# EAGLE board MainStation (EAGLE 5.00)
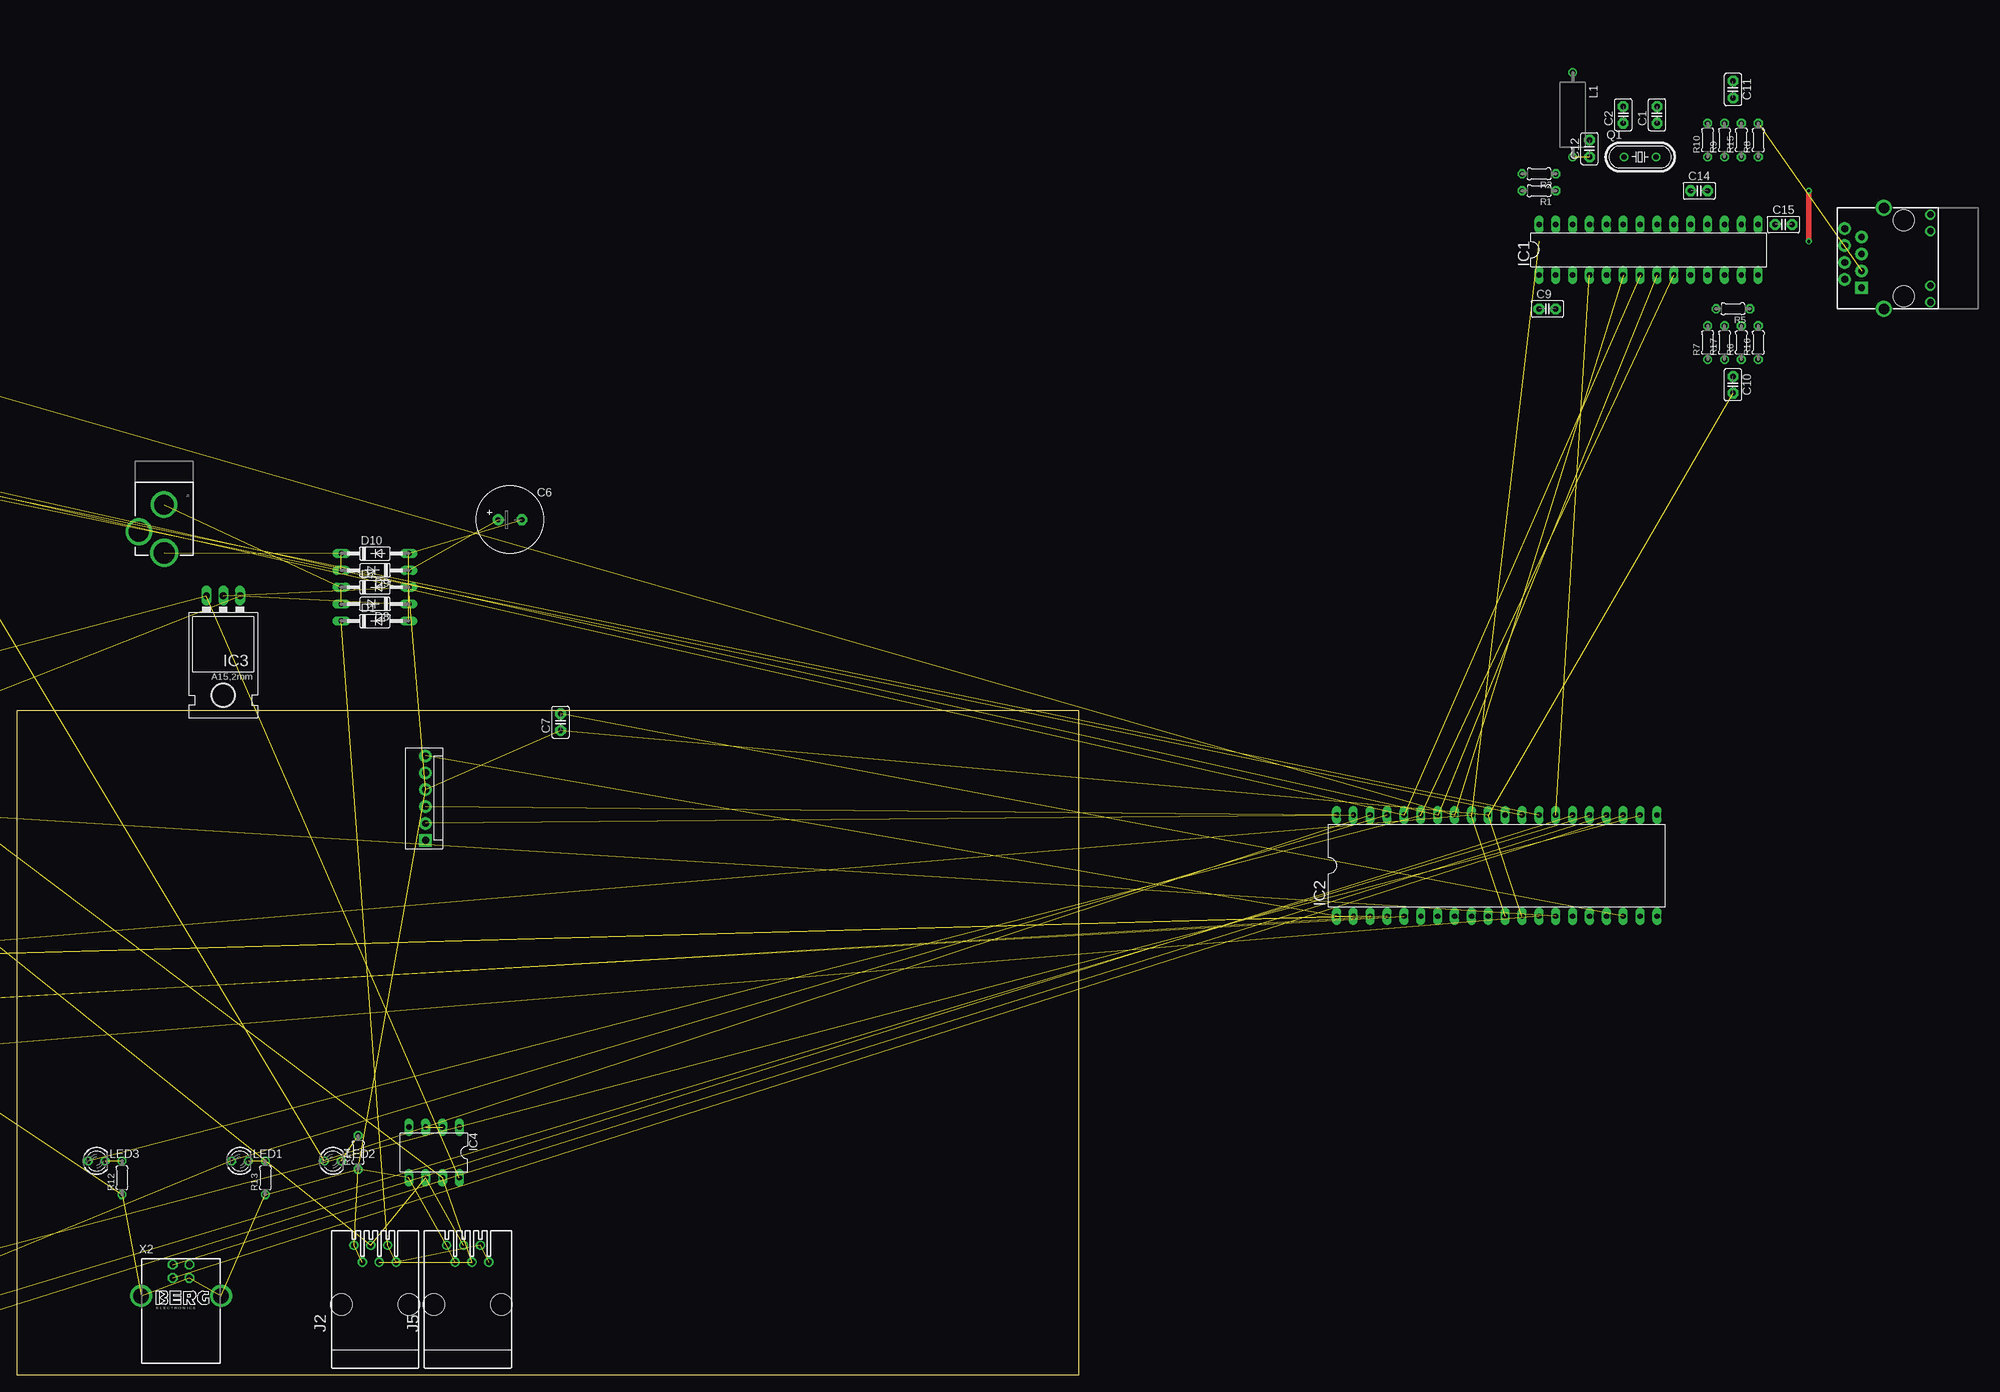
[diagram p0: board, top side]
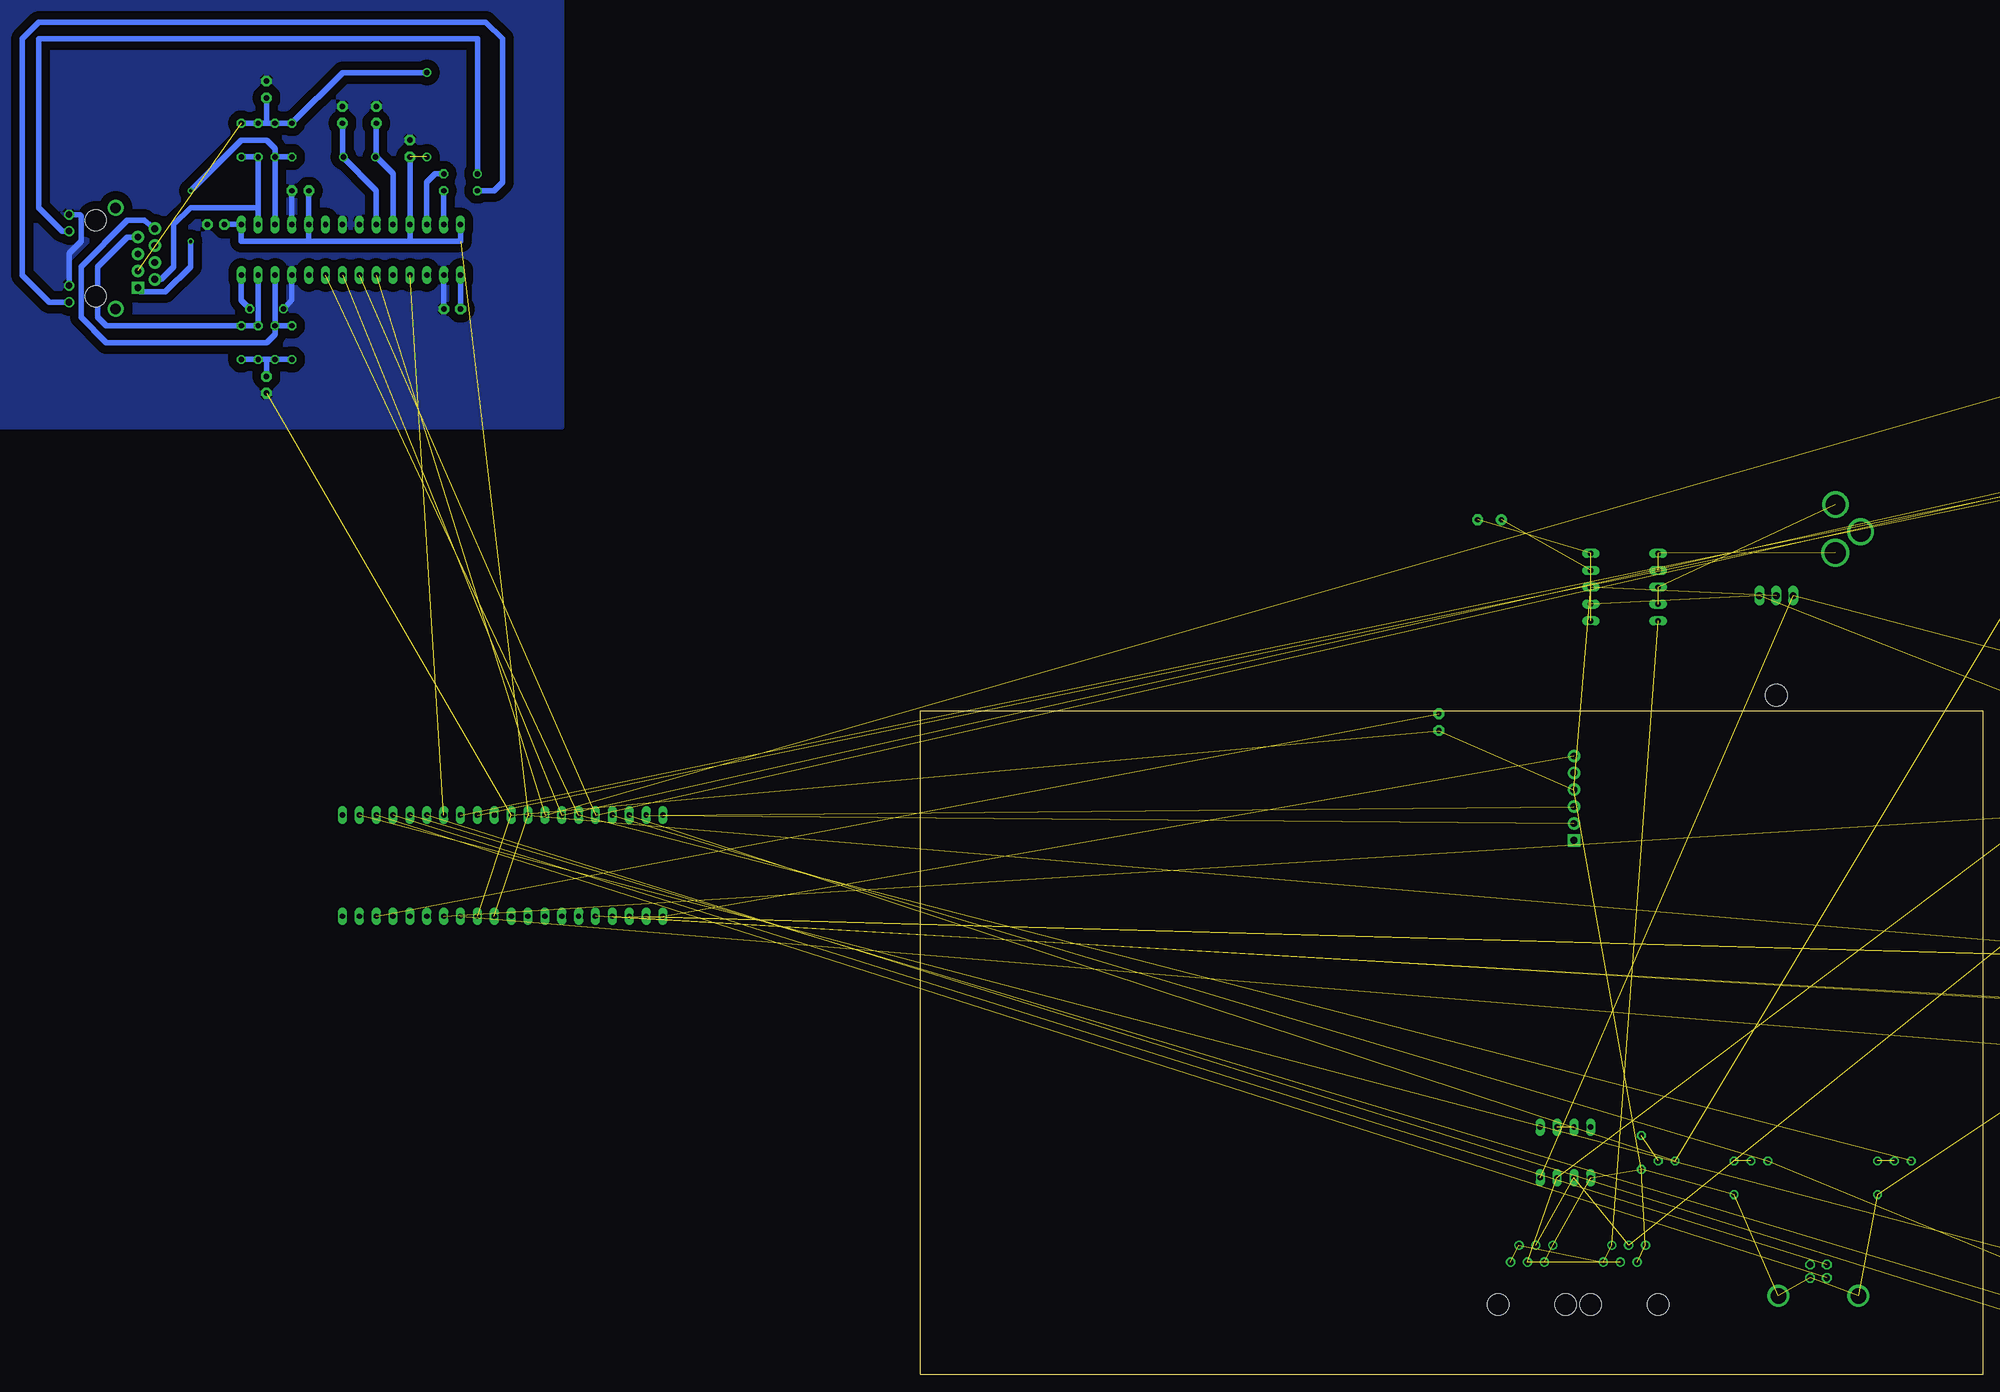
[diagram p1: board, bottom side, seen from below]

Size 160 x 100 mm. Coordinates in mm from the lower left corner, seen from the top.
Outline: 0,0 160,0 160,100 0,100 0,0
Copper layers (1*16): Top 0.035mm / dielectric 1.5mm / Bottom 0.035mm
Design rules "default": minimum track width 10mil, minimum drill 24mil, track to track 8mil, track to pad 8mil, pad to pad 8mil, via to via 8mil, smd to smd 8mil, copper to edge 40mil, drill to drill 8mil, minimum pad ring 10mil, minimum via ring 8mil, stop-mask expansion 4mil, vias tented up to drill 0mil, thermal gap 10mil

## Footprints (pad centres in the part's own frame; a part is rotated, then mirrored left to right if it is on the bottom)
C2.5-2 = drill 0.813 pad 1.6 octagon: 1 -1.27,0; 2 1.27,0
E2,5-5 = drill 0.813 pad 1.6 round: + -1.27,0 | drill 0.813 pad 1.6 octagon: - 1.27,0
E3,5-10 = drill 0.813 pad 1.6 round: + -1.778,0 | drill 0.813 pad 1.6 octagon: - 1.778,0
C050-025X075 = drill 0.813 octagon: 1 -2.54,0; 2 2.54,0
DO35-10 = drill 0.813 long: A 5.08,0; C -5.08,0
DIL28-3 = drill 0.813 long: 1 -16.51,-3.81; 2 -13.97,-3.81; 3 -11.43,-3.81; 4 -8.89,-3.81; 5 -6.35,-3.81; 6 -3.81,-3.81; 7 -1.27,-3.81; 8 1.27,-3.81; 9 3.81,-3.81; 10 6.35,-3.81; 11 8.89,-3.81; 12 11.43,-3.81; 13 13.97,-3.81; 14 16.51,-3.81; 15 16.51,3.81; 16 13.97,3.81; 17 11.43,3.81; 18 8.89,3.81; 19 6.35,3.81; 20 3.81,3.81; 21 1.27,3.81; 22 -1.27,3.81; 23 -3.81,3.81; 24 -6.35,3.81; 25 -8.89,3.81; 26 -11.43,3.81; 27 -13.97,3.81; 28 -16.51,3.81
DIL40 = drill 0.813 long: 1 -24.13,-7.62; 2 -21.59,-7.62; 3 -19.05,-7.62; 4 -16.51,-7.62; 5 -13.97,-7.62; 6 -11.43,-7.62; 7 -8.89,-7.62; 8 -6.35,-7.62; 9 -3.81,-7.62; 10 -1.27,-7.62; 11 1.27,-7.62; 12 3.81,-7.62; 13 6.35,-7.62; 14 8.89,-7.62; 15 11.43,-7.62; 16 13.97,-7.62; 17 16.51,-7.62; 18 19.05,-7.62; 19 21.59,-7.62; 20 24.13,-7.62; 21 24.13,7.62; 22 21.59,7.62; 23 19.05,7.62; 24 16.51,7.62; 25 13.97,7.62; 26 11.43,7.62; 27 8.89,7.62; 28 6.35,7.62; 29 3.81,7.62; 30 1.27,7.62; 31 -1.27,7.62; 32 -3.81,7.62; 33 -6.35,7.62; 34 -8.89,7.62; 35 -11.43,7.62; 36 -13.97,7.62; 37 -16.51,7.62; 38 -19.05,7.62; 39 -21.59,7.62; 40 -24.13,7.62
78XXL = drill 1.016 long: GND 0,-3.81; IN -2.54,-3.81; OUT 2.54,-3.81 | hole 3.302: 0,11.176
DIL08 = drill 0.813 long: 1 -3.81,-3.81; 2 -1.27,-3.81; 3 1.27,-3.81; 4 3.81,-3.81; 5 3.81,3.81; 6 1.27,3.81; 7 -1.27,3.81; 8 -3.81,3.81
POWER_JACK_PTH_LOCK = drill 2.997 round: GND 0.025,6.608; GNDBREAK 3.812,10.7 | drill 3.2 round: PWR 0,13.878
520470-3 = drill 0.889 round: 1 -3.175,8.89; 2 -1.905,6.35; 3 -0.635,8.89; 4 0.635,6.35; 5 1.905,8.89; 6 3.175,6.35 | hole 3.251: -5.08,0; 5.08,0
2200-12.7 = drill 0.8 pad 1.27 round: 1 -6.35,0; 2 6.35,0
LED3MM = drill 0.813 octagon: A -1.27,0; K 1.27,0
HC49/S = drill 0.813 round: 1 -2.413,0; 2 2.413,0
0204/5 = drill 0.813 octagon: 1 -2.54,0; 2 2.54,0
0204/7 = drill 0.813 octagon: 1 -3.81,0; 2 3.81,0
MICRO-SD-SOCKET-PP = smd 0.8 x 1.5: 1 -8.94,10.7; 2 -7.84,10.3; 3 -6.74,10.7; 4 -5.64,10.9; 5 -4.54,10.7; 6 -3.44,10.9; 7 -2.34,10.7; 8 -1.24,10.7 | smd 1.8 x 1.4: CD1 -2.05,0.4; CD2 -7.75,0.4 | smd 1.4 x 1.9: GND1 -13.6,14.55; GND3 -0.45,13.55
DIL8 = drill 0.813 long: 1 -3.81,-3.81; 2 -1.27,-3.81; 3 1.27,-3.81; 4 3.81,-3.81; 5 3.81,3.81; 6 1.27,3.81; 7 -1.27,3.81; 8 -3.81,3.81
23A256 = drill 0.8 long: CS -5.08,-5.08; HOLD -2.54,2.54; NC 0,-5.08; SCK 0,2.54; SI 2.54,2.54; SO -2.54,-5.08; VCC -5.08,2.54; VSS 2.54,-5.08
MOLEX-1X6 = drill 1.016 pad 1.88 square: 1 0,0 | drill 1.016 pad 1.88 round: 2 2.54,0; 3 5.08,0; 4 7.62,0; 5 10.16,0; 6 12.7,0
MRF24J40MA = drill 0.8 pad 2.032 square: CS(LOW) 15.748,4.064; GND 0,14.224; GND1 15.748,11.684; GND2 15.748,14.224; INT 0,6.604; NC 15.748,6.604; RESET 0,11.684; SCK 0,1.524; SDI 0,4.064; SDO 15.748,1.524; VIN 15.748,9.144; WAKE 0,9.144
MAGJACK = drill 1 pad 1.88 square: 1 3.175,17.445 | drill 1 pad 1.88 round: 2 4.445,19.985; 3 5.715,17.445; 4 6.985,19.985; 5 8.255,17.445; 6 9.525,19.985; 7 10.795,17.445; 8 12.065,19.985 | drill 1 pad 1.27 round: 9 1,7.1; 10 3.5,7.1; 11 11.7,7.1; 12 14.2,7.1 | drill 1.6 pad 2.184 round: M1 0,14.1; M2 15.2,14.1 | hole 3.2: 1.905,11.095; 13.335,11.095
PN61729-S = drill 0.95 octagon: 1 1.25,4.71; 2 -1.25,4.71; 3 -1.25,2.71; 4 1.25,2.71 | drill 2.3 pad 2.9 round: S1 -6.02,0; S2 6.02,0

## Placement (x,y rotation side)
C1  [C2.5-2]  247.01,189.7 90 top  (outside the outline)
C2  [C2.5-2]  241.93,189.7 90 top  (outside the outline)
C3  [C2.5-2]  -32.39,53.81 0 top  (outside the outline)
C4  [C2.5-2]  -32.39,47.46 0 top  (outside the outline)
C5  10uf  [E2,5-5]  -53.98,93.18 0 top  (outside the outline)
C6  470uf  [E3,5-10]  74.29,128.74 0 top  (outside the outline)
C7  100nf  [C2.5-2]  81.91,98.26 90 top
C8  470uf  [E3,5-10]  -41.28,42.38 0 top  (outside the outline)
C9  10uf  [C2.5-2]  230.5,160.49 0 top  (outside the outline)
C10  100nf  [C2.5-2]  258.44,149.06 270 top  (outside the outline)
C11  100nf  [C2.5-2]  258.44,193.51 270 top  (outside the outline)
C12  100nf ?  [C2.5-2]  236.85,184.62 90 top  (outside the outline)
C13  10uf  [E2,5-5]  -144.15,-47.79 0 top  (outside the outline)
C14  100nf ?  [C2.5-2]  253.36,178.27 0 top  (outside the outline)
C15  100nf ?  [C2.5-2]  266.06,173.19 0 top  (outside the outline)
C18  100nf  [C050-025X075]  -41.28,86.83 0 top  (outside the outline)
C19  100nf  [C050-025X075]  -50.17,86.83 0 top  (outside the outline)
D1  [DO35-10]  53.97,113.5 0 top  (outside the outline)
D7  BA243A  [DO35-10]  53.97,118.58 0 top  (outside the outline)
D8  BA243A  [DO35-10]  53.97,116.04 180 top  (outside the outline)
D9  BA243A  [DO35-10]  53.97,121.12 180 top  (outside the outline)
D10  BA243A  [DO35-10]  53.97,123.66 0 top  (outside the outline)
IC1  ENC28J60SP  [DIL28-3]  245.74,169.38 0 top  (outside the outline)
IC2  PIC18F4550_40  [DIL40]  222.88,76.67 0 top  (outside the outline)
IC3  LM7805  [78XXL]  31.11,113.5 180 top
IC4  LTC485N  [DIL08]  62.86,33.49 180 top
J1  POWER_JACKPTH_LOCK  [POWER_JACK_PTH_LOCK]  22.22,137.63 180 top  (outside the outline)
J2  [520470-3]  53.97,10.63 0 top
J5  [520470-3]  67.94,10.63 0 top
L1  100u  [2200-12.7]  234.31,189.7 270 top  (outside the outline)
LED1  [LED3MM]  33.65,32.22 0 top
LED2  [LED3MM]  47.62,32.22 0 top
LED3  [LED3MM]  12.06,32.22 0 top
Q1  25Mhz  [HC49/S]  244.47,183.35 0 top  (outside the outline)
Q2  12Mhz  [HC49/S]  -31.12,85.56 0 top  (outside the outline)
R1  56  [0204/5]  229.23,178.27 180 top  (outside the outline)
R2  56  [0204/5]  229.23,180.81 180 top  (outside the outline)
R3  10k  [0204/7]  -32.39,99.53 0 top  (outside the outline)
R4  10k  [0204/7]  -42.55,99.53 0 top  (outside the outline)
R5  2.32k 1%  [0204/5]  258.44,160.49 180 top  (outside the outline)
R6  100 1%  [0204/5]  259.71,155.41 90 top  (outside the outline)
R7  100 1%  [0204/5]  254.63,155.41 90 top  (outside the outline)
R8  100 1%  [0204/5]  262.25,185.89 90 top  (outside the outline)
R9  100 1%  [0204/5]  257.17,185.89 90 top  (outside the outline)
R10  100 1%  [0204/5]  254.63,185.89 90 top  (outside the outline)
R12  500  [0204/5]  15.87,29.68 90 top
R13  500  [0204/5]  37.46,29.68 90 top
R14  500  [0204/5]  51.43,33.49 90 top
R15  100 1%  [0204/5]  259.71,185.89 90 top  (outside the outline)
R16  100 1%  [0204/5]  262.25,155.41 90 top  (outside the outline)
R17  100 1%  [0204/5]  257.17,155.41 90 top  (outside the outline)
U1  USD-SOCKETNEW  [MICRO-SD-SOCKET-PP]  -127.64,-30.01 90 top  (outside the outline)
U2  MCP2551P  [DIL8]  -12.07,11.9 0 top  (outside the outline)
U$1  23A256  [23A256]  -28.58,60.16 0 top  (outside the outline)
U$2  PIC-ICSPPTH  [MOLEX-1X6]  61.59,80.48 90 top
U$3  MRF24J40MA  [MRF24J40MA]  -22.23,137.63 90 top  (outside the outline)
U$6  MAGJACK  [MAGJACK]  295.27,160.49 90 top  (outside the outline)
X2  PN61729-S  [PN61729-S]  24.76,11.9 0 top

## Library data of the parts
C1-C4 C7 C9-C12 C14 C15 = capacitor-wima
C5 C6 C8 C13 C18 C19 R1-R10 R12-R17 = rcl
D1 D7-D10 = diode
IC1 = microchip-6
IC2 = microchip
IC3 = v-reg
IC4 = linear-technology
J1 U1 U$2 U$6 = SparkFun
J2 J5 = con-amp
L1 = resistor
LED1-LED3 = led
Q1 Q2 = crystal
U2 = microchip_can
U$1 = 23A256
U$3 = MRF24J40MA
X2 = con-berg

## Nets
3.3V: C12.1 C14.1 C15.1 IC1.15 IC1.19 IC1.25 IC1.28 IC2.11 IC2.32 L1.2 U1.4 U$1.VCC U$3.VIN
5V: C5.+ C19.1 IC3.OUT IC4.8 R4.2
12V: C6.+ C8.+ C18.1 D1.A D8.C D9.C IC3.IN
GND: C1.2 C2.2 C3.1 C4.1 C5.- C6.- C7.1 C8.- C9.2 C10.2 C11.1 C12.2 C14.2 C15.2 C18.2 C19.2 D7.A D10.A IC1.2 IC1.11 IC1.18 IC1.21 IC1.22 IC2.12 IC2.31 IC3.GND IC4.5 J2.1 J2.2 J5.1 J5.2 R3.1 R5.2 R12.1 R13.1 R14.1 U1.6 U1.CD1 U1.CD2 U1.GND1 U1.GND3 U$1.VSS U$2.4 U$3.GND U$3.GND1 U$3.GND2 U$6.10 U$6.12 X2.4 X2.S1 X2.S2
N$1: R1.2 U$6.9
N$2: R2.2 U$6.11
N$3: IC1.7 IC2.36 U1.3 U$3.SDI
N$4: C2.1 IC1.24 Q1.1
N$5: IC1.12 R7.2 R17.2 U$6.8
N$6: C11.2 L1.1 R8.2 R9.2 R10.2 R15.2 U$6.3
N$7: C10.1 R6.1 R7.1 R16.1 R17.1
N$8: IC1.16 R8.1 R15.1 U$6.2
N$9: C1.1 IC1.23 Q1.2
N$10: C3.2 IC2.14 Q2.2
N$11: IC1.8 IC2.34 U1.5 U$3.SCK
N$12: IC1.6 IC2.33 U1.7 U$3.SDO
N$13: IC1.9 IC2.35 LED3.A
N$14: C7.2 IC2.18
N$15: IC1.13 R6.2 R16.2 U$6.7
N$16: IC2.40 U$2.3
N$17: IC2.39 U$2.2
N$18: IC2.1 U$2.6
N$19: IC1.26 R2.1
N$20: IC2.24 X2.2
N$21: C4.2 IC2.13 Q2.1
N$22: IC1.4 IC2.27
N$23: IC2.37 LED1.A U1.2
N$24: IC2.38 LED2.A U$3.CS(LOW)
N$25: IC2.23 X2.3
N$26: U$3.RESET
N$27: D7.C D8.A J1.GND
N$28: D9.A D10.C J1.PWR
N$29: IC4.6 J2.3 J5.3 R4.1
N$30: IC4.7 J2.4 J5.4 R3.2
N$31: IC2.26 U2.4
N$32: IC2.22 U2.8
N$33: D1.C J2.5 J2.6 J5.5 J5.6
N$34: IC2.2 U$1.SCK
N$35: IC2.30
N$36: IC2.29 U$3.WAKE
N$37: IC2.28 U$3.INT
N$38: IC1.27 R1.1
N$40: IC1.17 R9.1 R10.1 U$6.1
N$41: IC2.25 U2.1
N$42: C9.1 IC1.1
N$43: IC1.14 R5.1
N$45: IC2.3 U$1.SI
N$46: IC2.4 U$1.SO
N$47: IC2.5 U$1.CS
N$48: LED3.K R12.2
N$49: LED2.K R14.2
N$50: LED1.K R13.2
N$51: IC4.2 IC4.3
VDD: U2.3
VREF: U2.5
VSS: U2.2

## Tracks (layer width: path | path; a pad name or v marks a point on that pad's centre or on a via)
3.3V  (6 unrouted)
  Bottom 0.813: C14.1 IC1.19 252.09,170.65 | C15.1 IC1.15 262.25,170.65 252.09,170.65 | IC1.25 C12.1 IC1.25 | IC1.28 229.23,170.65 230.5,170.65 236.85,170.65 | 236.85,170.65 IC1.25 | 236.85,170.65 252.09,170.65
5V  (4 unrouted)
12V  (6 unrouted)
GND  (35 unrouted)
  Bottom 0.813: IC1.18 C14.2 | C9.2 IC1.2 | R5.2 254.63,161.76 IC1.11 | U$6.10 288.17,168.86 286.38,170.65 286.38,174.46 286.61,174.69 U$6.12
  pour Bottom (isolate 1.27): 213.99,213.83 309.24,213.83 309.24,142.71 213.99,142.71
N$1
  Bottom 0.813: U$6.9 291.19,161.49 295.27,165.57 295.27,201.13 292.73,203.67 225.42,203.67 222.88,201.13 222.88,179.54 224.15,178.27 R1.2
N$2
  Bottom 0.813: R2.2 226.69,201.13 292.73,201.13 292.73,175.73 289.19,172.19 U$6.11
N$3  (3 unrouted)
N$4
  Bottom 0.813: 241.93,183.35 C2.1 | 242.06,183.48 Q1.1 241.93,183.35 | IC1.24 239.39,180.81 241.93,183.35
N$5
  Bottom 0.813: 257.17,159.22 R17.2 R7.2 | 257.17,159.22 IC1.12 | U$6.8 276.86,173.82 279.39,173.82 286.38,166.84 286.38,159.22 282.57,155.41 258.44,155.41 257.17,156.68 257.17,159.22
N$6  (1 unrouted)
  Bottom 0.813: 258.44,188.43 C11.2 | 258.44,188.43 R9.2 R10.2 247.01,196.05 L1.1 | 258.44,188.43 R15.2 R8.2
N$7
  Bottom 0.813: R7.1 R17.1 258.44,152.87 | R16.1 R6.1 258.44,152.87 | C10.1 258.44,152.87
N$8
  Bottom 0.813: 259.71,175.73 R15.1 R8.1 | IC1.16 259.71,175.73 | 259.71,175.73 269.87,175.73 272.41,173.19 272.41,166.84 274.31,164.94 U$6.2
N$9
  Bottom 0.813: 247.01,183.35 C1.1 | IC1.23 241.93,178.27 247.01,183.35 | 247.01,183.35 Q1.2
N$10  (2 unrouted)
N$11  (3 unrouted)
N$12  (3 unrouted)
N$13  (2 unrouted)
N$14  (1 unrouted)
N$15
  Bottom 0.813: R6.2 IC1.13 R6.2 | R6.2 R16.2 | R6.2 R16.2 | R16.2 282.57,157.95 283.84,159.22 283.84,166.84 279.39,171.28 U$6.7
N$16  (1 unrouted)
N$17  (1 unrouted)
N$18  (1 unrouted)
N$19
  Bottom 0.813: R2.1 233.04,180.81 234.31,179.54 IC1.26
N$20  (1 unrouted)
N$21  (2 unrouted)
N$22  (1 unrouted)
N$23  (2 unrouted)
N$24  (2 unrouted)
N$25  (1 unrouted)
N$27  (2 unrouted)
N$28  (2 unrouted)
N$29  (3 unrouted)
N$30  (3 unrouted)
N$31  (1 unrouted)
N$32  (1 unrouted)
N$33  (4 unrouted)
N$34  (1 unrouted)
N$36  (1 unrouted)
N$37  (1 unrouted)
N$38
  Bottom 0.813: IC1.27 R1.1
N$40  (via drill 0.51)
  Top 0.813: v269.87,178.27 v269.87,170.65
  Bottom 0.813: R9.1 R10.1 | IC1.17 R9.1 | v269.87,178.27 262.25,185.89 258.44,185.89 257.17,184.62 R9.1 | U$6.1 277.82,163.37 277.49,163.03 273.68,163.03 269.87,166.84 v269.87,170.65
N$41  (1 unrouted)
N$42
  Bottom 0.813: C9.1 IC1.1
N$43
  Bottom 0.813: R5.1 262.25,161.76 IC1.14
N$45  (1 unrouted)
N$46  (1 unrouted)
N$47  (1 unrouted)
N$48  (1 unrouted)
N$49  (1 unrouted)
N$50  (1 unrouted)
N$51  (1 unrouted)